# EAGLE board ac and dc measurement-old (EAGLE 6.2)
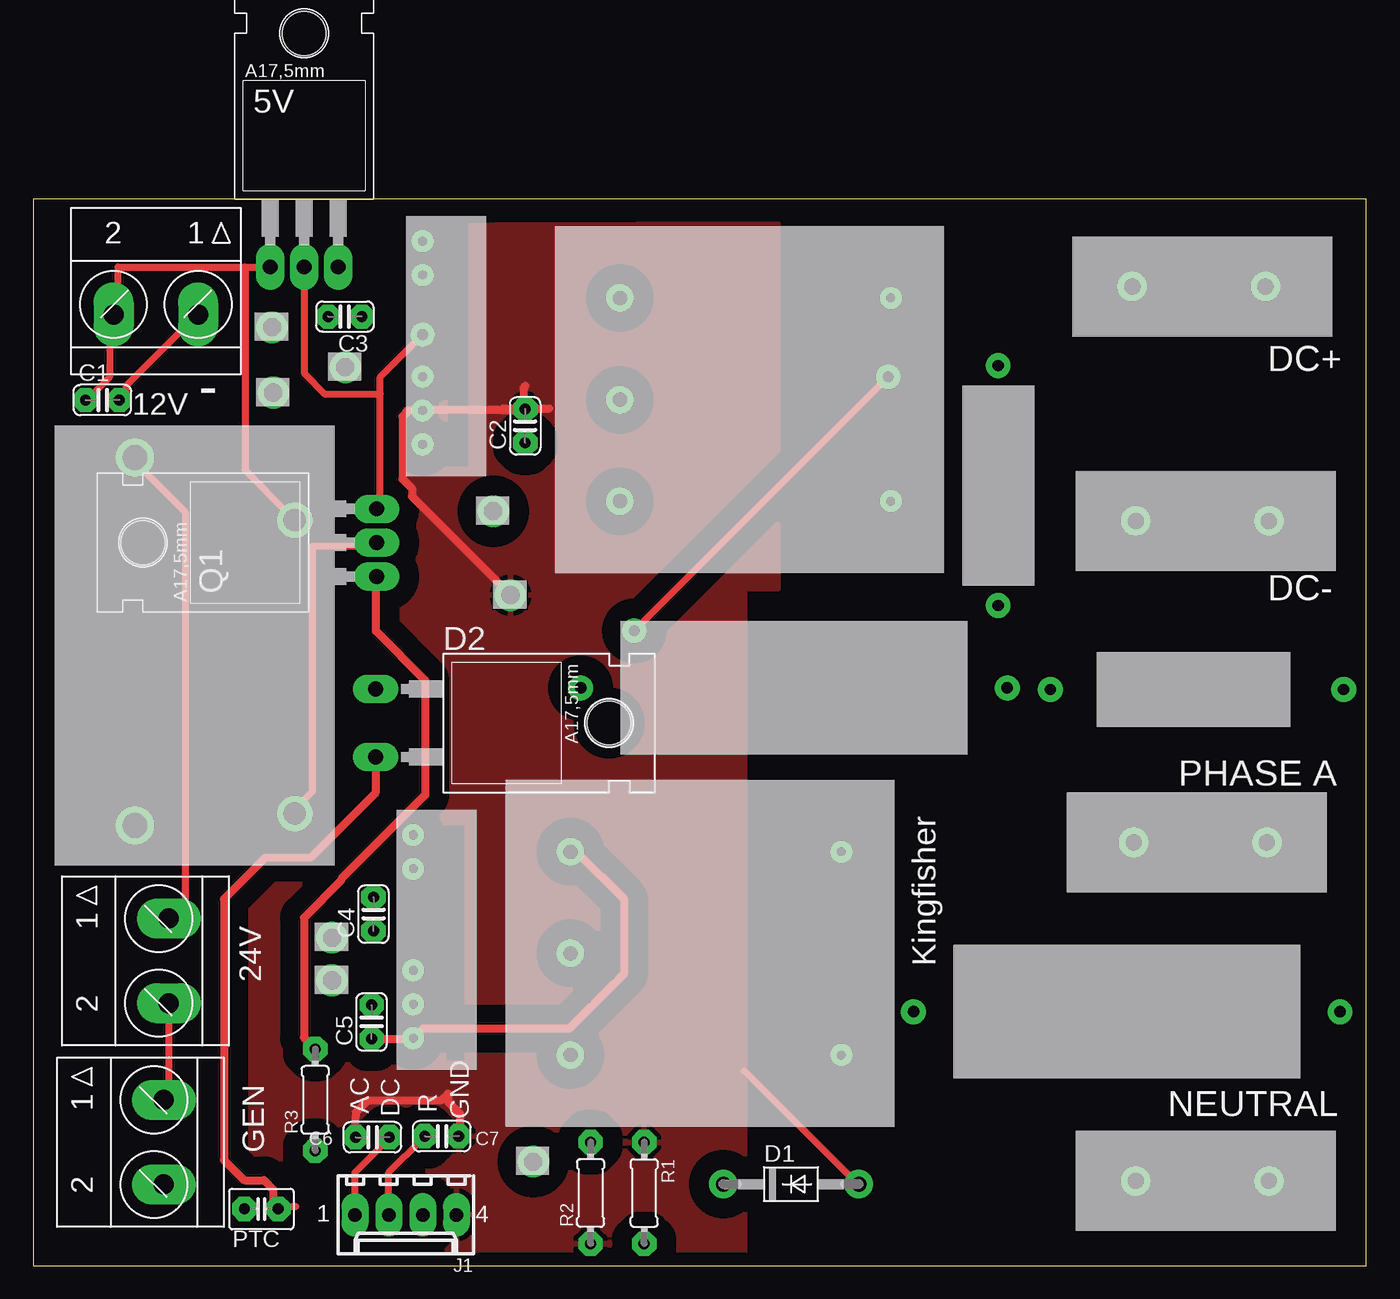
[diagram p0: board, top side]
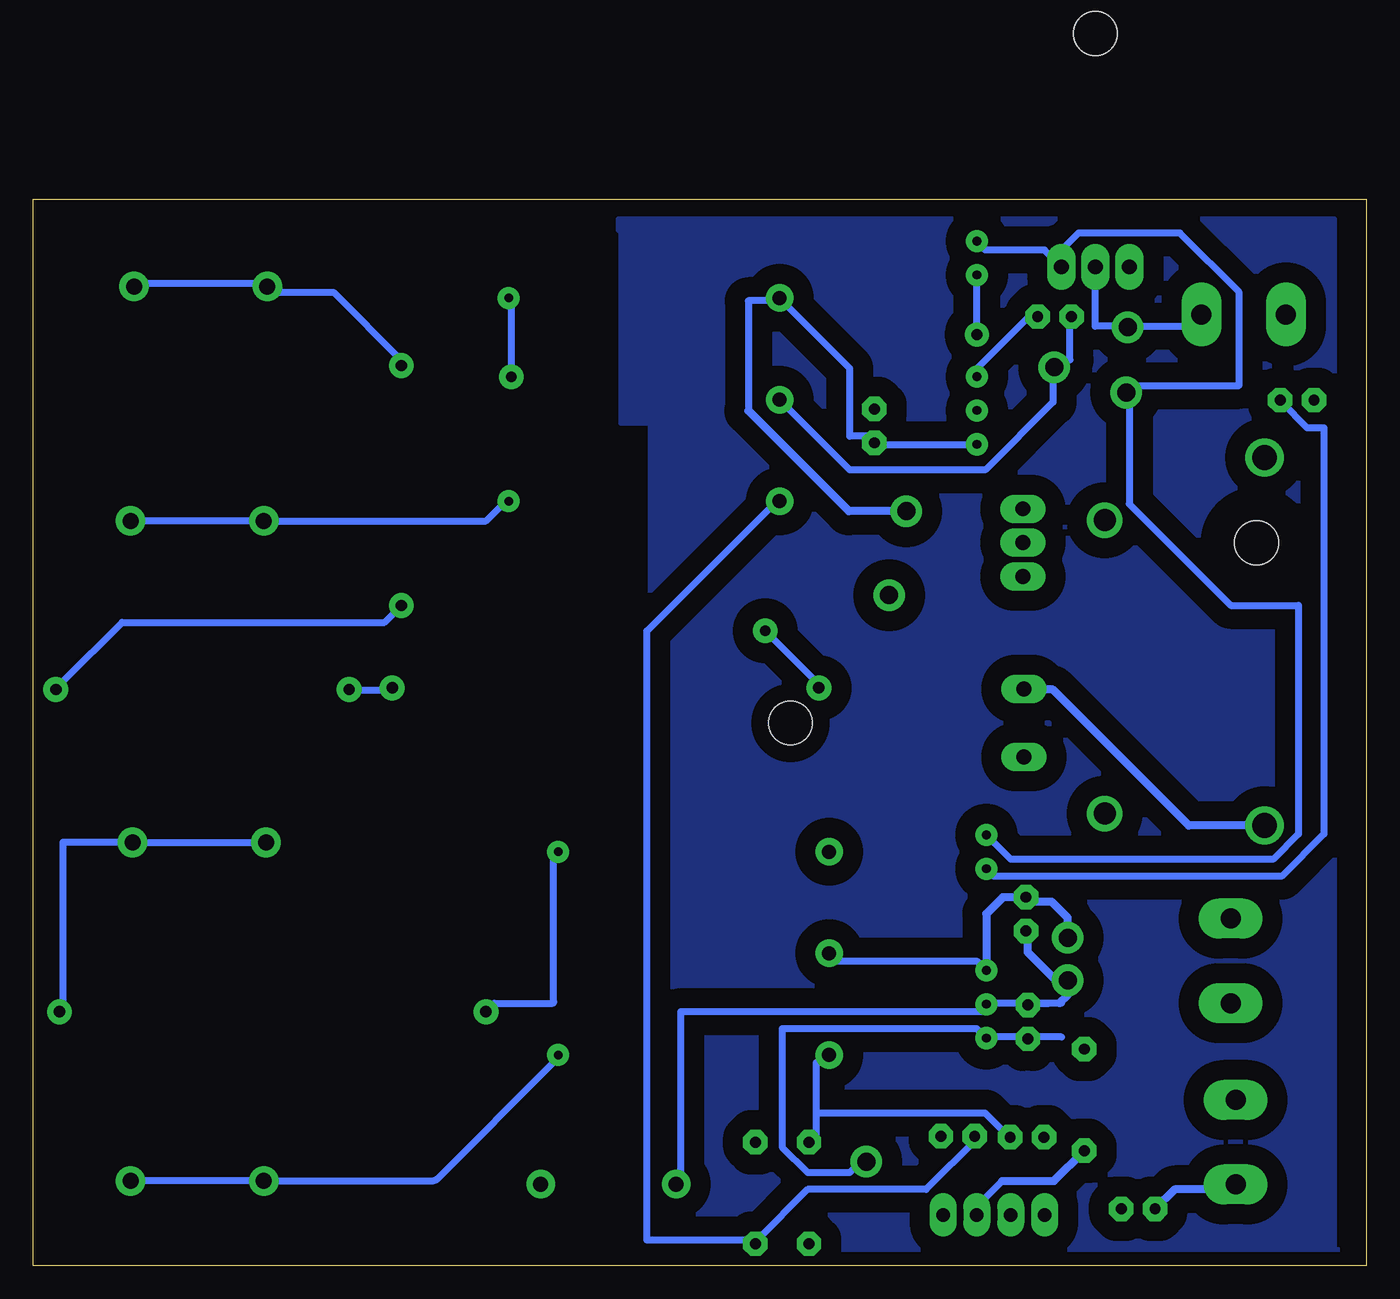
[diagram p1: board, bottom side, seen from below]

Size 100 x 80 mm. Coordinates in mm from the lower left corner, seen from the top.
Outline: 0,0 100,0 100,80 0,80 0,0
Copper layers (1*16): Top 0.035mm / dielectric 1.5mm / Bottom 0.035mm
Design rules: minimum track width 20mil, minimum drill 0.8mm, track to track 1.5mm, track to pad 1.5mm, pad to pad 15mil, via to via 20mil, smd to smd 0mil, copper to edge 40mil, drill to drill 10mil, minimum pad ring 20mil, minimum via ring 20mil, stop-mask expansion 0mil, vias tented up to drill 0mil, thermal gap 15mil
Net classes: 1 24V path: width 2.413 mm; 2 DC LINK: width 0 mm, clearance 3.632 mm; 3 AC: width 0.003 mm, clearance 2.362 mm
tRestrict: area 31.1,60 to 32.6,78; area 31,15.4 to 32.3,33

## Footprints (pad centres in the part's own frame; a part is rotated, then mirrored left to right if it is on the bottom)
TO220 = drill 1.118 long: 1 -2.54,-6.35; 2 0,-6.35; 3 2.54,-6.35 | hole 3.302: 0,11.176
AKL701_2_15 = drill 1.5 pad 3 long: 1 -3.175,0; 2 3.175,0
C025-024X044 = drill 0.813 octagon: 1 -1.27,0; 2 1.27,0
DO41-10 = drill 1.118: A 5.08,0; C -5.08,0
TO220AC = drill 1.118 long: A 2.54,-6.35; C -2.54,-6.35 | hole 3.302: 0,11.176
6410-04 = drill 1.016 long: 1 3.81,0; 2 1.27,0; 3 -1.27,0; 4 -3.81,0
C025-030X050 = drill 0.813 octagon: 1 -1.27,0; 2 1.27,0
0204/7 = drill 0.813 octagon: 1 -3.81,0; 2 3.81,0
KFP_DC-DC = drill 0.65: 0V 4.42,0; 0VOUT 14.58,0; + 1.88,0; +VOUT 17.12,0; -VOUT 12.04,0
KFP_VOLTAGETRANSDUCER = drill 1.05: + 7.62,-20.32; - 0,-20.32; M 15.24,-20.32 | drill 0.64: +HT] 0,0; -HT 15.24,0
KFP_33K = drill 0.85: P$1 0,0; P$2 32,0
KFP_22K = drill 0.85: P$1 0,0; P$2 22,0
KFP_18K = drill 0.85: P$1 0,0; P$2 18,0
HIGH_AMP_TERMINAL = drill 1.2: P$1 0,0; P$2 10,0
KFP_RELAYSPST = drill 1.85: 11 0,0; 14 27.6,0 | drill 1.65: A1 0.9,-12; A2 22.9,-12
KFP_TEST = drill 1.35: P$1 0,0

## Placement (x,y rotation side)
5V  KFP_VOL_REG  [TO220]  20.32,81.28 0 top
12V  AKL701_215  [AKL701_2_15]  9.19,71.36 180 top
24V  AKL701_215  [AKL701_2_15]  10.16,22.86 270 top
C1  [C025-024X044]  5.18,64.94 0 top
C2  [C025-024X044]  36.9,63 90 top
C3  [C025-024X044]  23.38,71.2 180 top
C4  [C025-024X044]  25.52,26.37 90 top
C5  [C025-024X044]  25.38,18.28 90 top
C6  [C025-024X044]  25.44,9.63 0 top
C7  [C025-024X044]  30.64,9.71 0 top
D1  1N4004  [DO41-10]  56.85,6.11 0 top
D2  MBR750  [TO220AC]  32.02,40.71 270 top
GEN  AKL701_215  [AKL701_2_15]  9.79,9.26 270 top
J1  22-27-2041-04  [6410-04]  27.94,3.81 180 top
PTC  [C025-030X050]  17.11,4.25 0 top
Q1  BUZ10  [TO220]  19.4,54.24 90 top
R1  [0204/7]  45.83,5.45 270 top
R2  [0204/7]  41.81,5.45 90 top
R3  [0204/7]  21.15,12.43 90 top
U$1  KFP_DC_DC  [KFP_DC-DC]  29.21,78.74 270 top
U$2  KFP_DC_DC  [KFP_DC-DC]  28.5,34.19 270 top
U$3  KFP_VOLTAGETRANSDUCER  [KFP_VOLTAGETRANSDUCER]  64.33,72.59 270 top
U$4  KFP_VOLTAGETRANSDUCER  [KFP_VOLTAGETRANSDUCER]  60.62,31.05 270 top
U$5  KFP_33K  [KFP_33K]  66.04,19.05 0 top
U$6  KFP_33K  [KFP_33K]  41.07,43.35 0 top
U$7  KFP_22K  [KFP_22K]  76.31,43.22 0 top
U$8  [KFP_18K]  72.39,49.53 90 top
U$9  HIGH_AMP_TERMINAL  [HIGH_AMP_TERMINAL]  92.44,73.46 180 top
U$10  KFP_RELAY  [KFP_RELAYSPST]  7.62,33.02 90 top
U$11  HIGH_AMP_TERMINAL  [HIGH_AMP_TERMINAL]  92.71,55.88 180 top
U$12  HIGH_AMP_TERMINAL  [HIGH_AMP_TERMINAL]  82.55,31.75 0 top
U$13  HIGH_AMP_TERMINAL  [HIGH_AMP_TERMINAL]  92.71,6.35 180 top
U$14  KFP_TEST  [KFP_TEST]  23.4,67.4 0 top
U$15  KFP_TEST  [KFP_TEST]  34.5,56.6 0 top
U$16  KFP_TEST  [KFP_TEST]  18,65.5 0 top
U$17  KFP_TEST  [KFP_TEST]  37.5,7.8 0 top
U$18  KFP_TEST  [KFP_TEST]  22.4,24.6 0 top
U$19  KFP_TEST  [KFP_TEST]  35.8,50.3 0 top
U$20  KFP_TEST  [KFP_TEST]  22.4,21.4 0 top
U$21  KFP_TEST  [KFP_TEST]  17.9,70.4 0 top

## Library data of the parts
5V = kfp_vol_reg
12V 24V GEN = _con_riacon_akl701
C1-C7 PTC R1-R3 = resistor
D1 D2 = diode
J1 = con-molex; OC_FARNELL: unknown; OC_NEWARK: unknown
Q1 = transistor-fet
U$1 U$2 = kfp_ac-dc
U$3 U$4 = KFP_VOLTAGE TRANSDUCER_1
U$5 U$6 = kfp_33k_5W
U$7 = kfp_22k_3W
U$8 = kfp_4.7k_3W
U$9 U$11-U$13 = rectifier_components
U$10 = kfp_relaynew
U$14-U$21 = KFP_TEST

## Nets
N$1: 5V.2 12V.1 C1.2 Q1.3 U$1.0V U$2.0V U$21.P$1
N$2: 5V.3 U$1.+ U$2.+ U$16.P$1
N$3: C3.2 U$3.+ U$14.P$1
N$4: C4.2 U$2.-VOUT U$4.+ U$18.P$1
N$6: C2.1 U$1.+VOUT U$3.- U$15.P$1
N$7: C4.1 C5.2 D1.C U$2.0VOUT U$20.P$1
N$8: C5.1 U$2.+VOUT U$4.- U$17.P$1
N$9: 24V.2 GEN.1
N$10 [AC]: U$4.+HT] U$5.P$1
N$11: C6.2 J1.1 R2.2 U$4.M
N$12 [DC LINK]: U$3.+HT] U$6.P$1
N$13 [DC LINK]: U$6.P$2 U$7.P$1
N$14: Q1.2 U$10.A1
N$15 [AC]: U$5.P$2 U$12.P$1 U$12.P$2
N$16 [AC]: U$4.-HT U$13.P$1 U$13.P$2
N$17: Q1.1 R3.2
N$18 [DC LINK]: U$3.-HT U$11.P$1 U$11.P$2
N$19: GEN.2 PTC.1
N$20: D2.A PTC.2
N$21: U$8.P$2 U$9.P$1 U$9.P$2
N$22: C2.2 C6.1 C7.2 D1.A J1.4 R1.1 R2.1 U$1.0VOUT U$19.P$1
N$23: C3.1 U$1.-VOUT
N$24: J1.3 R3.1
N$25: 5V.1 12V.2 C1.1 U$10.A2
N$26: D2.C U$10.11
N$27: 24V.1 U$10.14
N$28: C7.1 J1.2 R1.2 U$3.M
RESISTOR [DC LINK]: U$7.P$2 U$8.P$1

## Tracks (layer width: path | path; a pad name or v marks a point on that pad's centre or on a via)
N$1  (via drill 0.8)
  Top 0.508: v29.21,69.85 26.04,66.67 26.04,65.41 | 26.04,65.41 26.04,57.15 Q1.3 | 12V.1 12.06,71.12 6.99,66.04 6.99,65.41 C1.2 | 5V.2 20.32,66.95 21.86,65.41 26.04,65.41
  Bottom 0.508: v29.21,69.85 U$1.0V | 5V.2 20.32,70.48 18.41,70.48 U$21.P$1 17.78,70.48 13.34,70.48 12.7,71.12 12V.1 | U$2.0V 27.94,29.21 6.35,29.21 3.17,32.38 3.17,62.87 4.45,62.87 6.35,64.77 C1.2
N$2
  Bottom 0.508: 23.5,75.56 24.13,76.2 28.57,76.2 29.21,76.83 U$1.+ | U$2.+ 27.94,31.75 26.67,30.48 6.99,30.48 5.08,32.38 5.08,49.53 10.16,49.53 17.78,57.15 17.78,65.41 U$16.P$1 17.78,66.04 9.53,66.04 9.53,73.03 13.97,77.47 21.59,77.47 23.5,75.56 | 23.5,75.56 5V.3
N$3
  Bottom 0.508: C3.2 22.23,71.12 22.23,67.94 22.86,67.94 U$14.P$1 23.5,67.31 23.5,64.77 28.57,59.69 38.73,59.69 43.81,64.77 U$3.+
N$4
  Bottom 0.508: U$2.-VOUT 28.57,22.23 29.21,22.86 40.01,22.86 U$4.+
  Bottom 0.6: U$18.P$1 22.4,26.1 23.6,27.3 25.18,27.3 C4.2 27.26,27.64 28.5,26.4 U$2.-VOUT
N$5
  pour Bottom: 8.9,78.5 56.1,78.5 56.1,77.7 55.9,77.7 55.9,63.2 53.7,63.2 53.7,0.7 2.1,0.7 2.1,1.2 2.4,1.2 2.4,78.5 7.7,78.5
N$6
  Bottom 0.508: U$1.+VOUT 29.21,61.59 36.83,61.59 C2.1 37.47,62.23 38.73,62.23 38.73,67.31 43.81,72.39 U$3.- 44.45,72.39 46.35,72.39 46.35,64.14
  Bottom 0.6: U$15.P$1 38.82,56.6 46.35,64.14
N$7
  Bottom 0.508: C5.2 23,19.68 22.86,19.68 27.94,19.68 U$2.0VOUT 28.57,19.05 51.44,19.05 51.44,6.35 D1.C
  Bottom 0.6: 23,19.68 22.4,20.28 U$20.P$1 23.3,21.4 25.4,23.5 25.4,24.98 C4.1
N$8
  Top 0.6: U$4.- 40.75,31.05 44.3,27.5 44.3,21.88 40.2,17.78 29.21,17.78 U$2.+VOUT 28.44,17.01 C5.1
  Bottom 0.508: 22.86,17.14 27.94,17.14 U$2.+VOUT 28.57,17.14 29.21,17.78 43.81,17.78 43.81,8.89 41.91,6.99 38.73,6.99 38.1,7.62 U$17.P$1
N$9
  Top 0.508: 24V.2 10.16,12.7 GEN.1
N$10
  Bottom 0.508: U$5.P$1 65.41,19.68 61.06,19.68 arc-90 60.96,19.79 60.96,30.48 U$4.+HT]
N$11
  Top 0.508: J1.1 24.13,6.99 26.67,9.53 C6.2
  Bottom 0.508: 41.27,11.43 41.27,15.24 40.64,15.24 U$4.M | 41.27,11.43 41.27,9.53 R2.2 | 41.27,11.43 28.57,11.43 27.3,10.16 C6.2
N$12  (via drill 0.8)
  Top 0.508: v45.09,47.62 v64.14,66.67
  Bottom 0.508: v64.14,66.67 64.14,72.39 U$3.+HT] | v45.09,47.62 41.27,43.81 U$6.P$1
N$13
  Bottom 0.508: U$6.P$2 73.66,43.18 76.2,43.18 U$7.P$1
N$14
  Top 0.508: Q1.2 25.4,53.98 20.95,53.98 20.95,35.56 19.68,34.29 U$10.A1
N$15
  Bottom 0.508: U$5.P$2 97.79,19.05 97.79,31.75 U$12.P$2 U$12.P$1
N$16
  Bottom 0.508: U$4.-HT 60.96,15.24 69.72,6.48 70.03,6.35 U$13.P$2 U$13.P$1
N$17
  Top 0.6: R3.2 20.3,17.09 20.3,26.1 23.1,28.9 23.1,29 29.4,35.3 29.4,43.9 25.7,47.6 25.7,51.65 Q1.1
N$18
  Bottom 0.508: U$3.-HT 64.77,57.15 66.04,55.88 U$11.P$2 U$11.P$1
N$19
  Bottom 0.508: 16.51,4.45 PTC.1 | 10.16,5.71 GEN.2
  Bottom 0.6: 10.16,5.71 14.38,5.71 PTC.1
N$20
  Top 0.508: 19.68,4.45 PTC.2
  Top 0.6: D2.A 25.67,35.47 20.8,30.6 17.4,30.6 14.3,27.5 14.3,7.9 15.8,6.4 17.3,6.4 18,5.7 18,4.63 PTC.2
N$21
  Bottom 0.508: U$8.P$2 72.39,67.94 77.47,73.03 81.92,73.03 U$9.P$2 82.55,73.66 92.08,73.66 U$9.P$1
N$22
  Top 0.508: 53.34,14.61 61.59,6.35 D1.A
  Top 0.6: 28.7,64.16 28.16,64.16 | 28.16,64.16 27.7,63.7 27.7,59 28.4,58.3 28.4,57.7 U$19.P$1 | C2.2 35.17,64.27 35.1,64.2 | 35.1,64.2 36.8,64.2 36.9,64.3 | 36.9,64.3 38.7,64.3 | 36.9,64.3 36.8,64.3 36.8,65.9 36.9,66 | U$1.0VOUT 28.7,64.16 | 28.16,64.16 28.06,64.16 28,64.1 | 35.1,64.2 28.74,64.2 28.7,64.16 | C6.1 24.17,11.17 24.2,11.2 24.2,11.5 25.1,12.4 30.6,12.4 31.1,12.9 31.1,12.3 32,11.4 32,9.8 C7.2
  pour Top: 2.74,77.94 55.88,78.14 55.88,50.8 53.34,50.8 53.34,0 2.54,0
N$23
  Bottom 0.508: U$1.-VOUT 29.21,67.31 25.4,71.12 24.77,71.12 C3.1
N$24
  Bottom 0.508: 27.3,6.35 29.21,4.45 J1.3
  Bottom 0.6: 27.3,6.35 23.42,6.35 R3.1
N$25
  Top 0.508: C1.1 4.45,65.41 5.71,66.67 5.71,71.12 12V.2 6.35,71.75 6.35,74.93 15.88,74.93 | 15.88,74.93 5V.1 | 15.88,74.93 15.88,59.69 19.05,56.52 U$10.A2
N$26
  Bottom 0.6: D2.C 23.55,43.25 13.32,33.02 U$10.11
N$27
  Top 0.508: 24V.1 11.43,27.3 11.43,56.52 7.62,60.33 U$10.14
N$28
  Top 0.508: J1.2 26.67,6.99 29.21,9.53 C7.1
  Bottom 0.508: C7.1 29.21,9.53 33.02,5.71 41.91,5.71 45.72,1.91 R1.2 46.35,1.91 53.98,1.91 53.98,47.62 44.45,57.15 U$3.M
RESISTOR
  Bottom 0.508: U$8.P$1 73.66,48.26 93.34,48.26 97.79,43.81 U$7.P$2

## Text on the board
tNames: DC+ | - | DC- | PHASE A | Kingfisher | R | AC | DC | GND | NEUTRAL